# Altium PCB CC2541Dev_board.PcbDoc
Units mm, origin at the board's own origin, x right, y up, seen from the top; angles counter-clockwise.
Board outline 62.9 x 61.5 mm, 2 copper layers (Top Layer, Bottom Layer), stack 1.671 mm thick; 18 components, 33 nets, 99 pads, 46 vias.
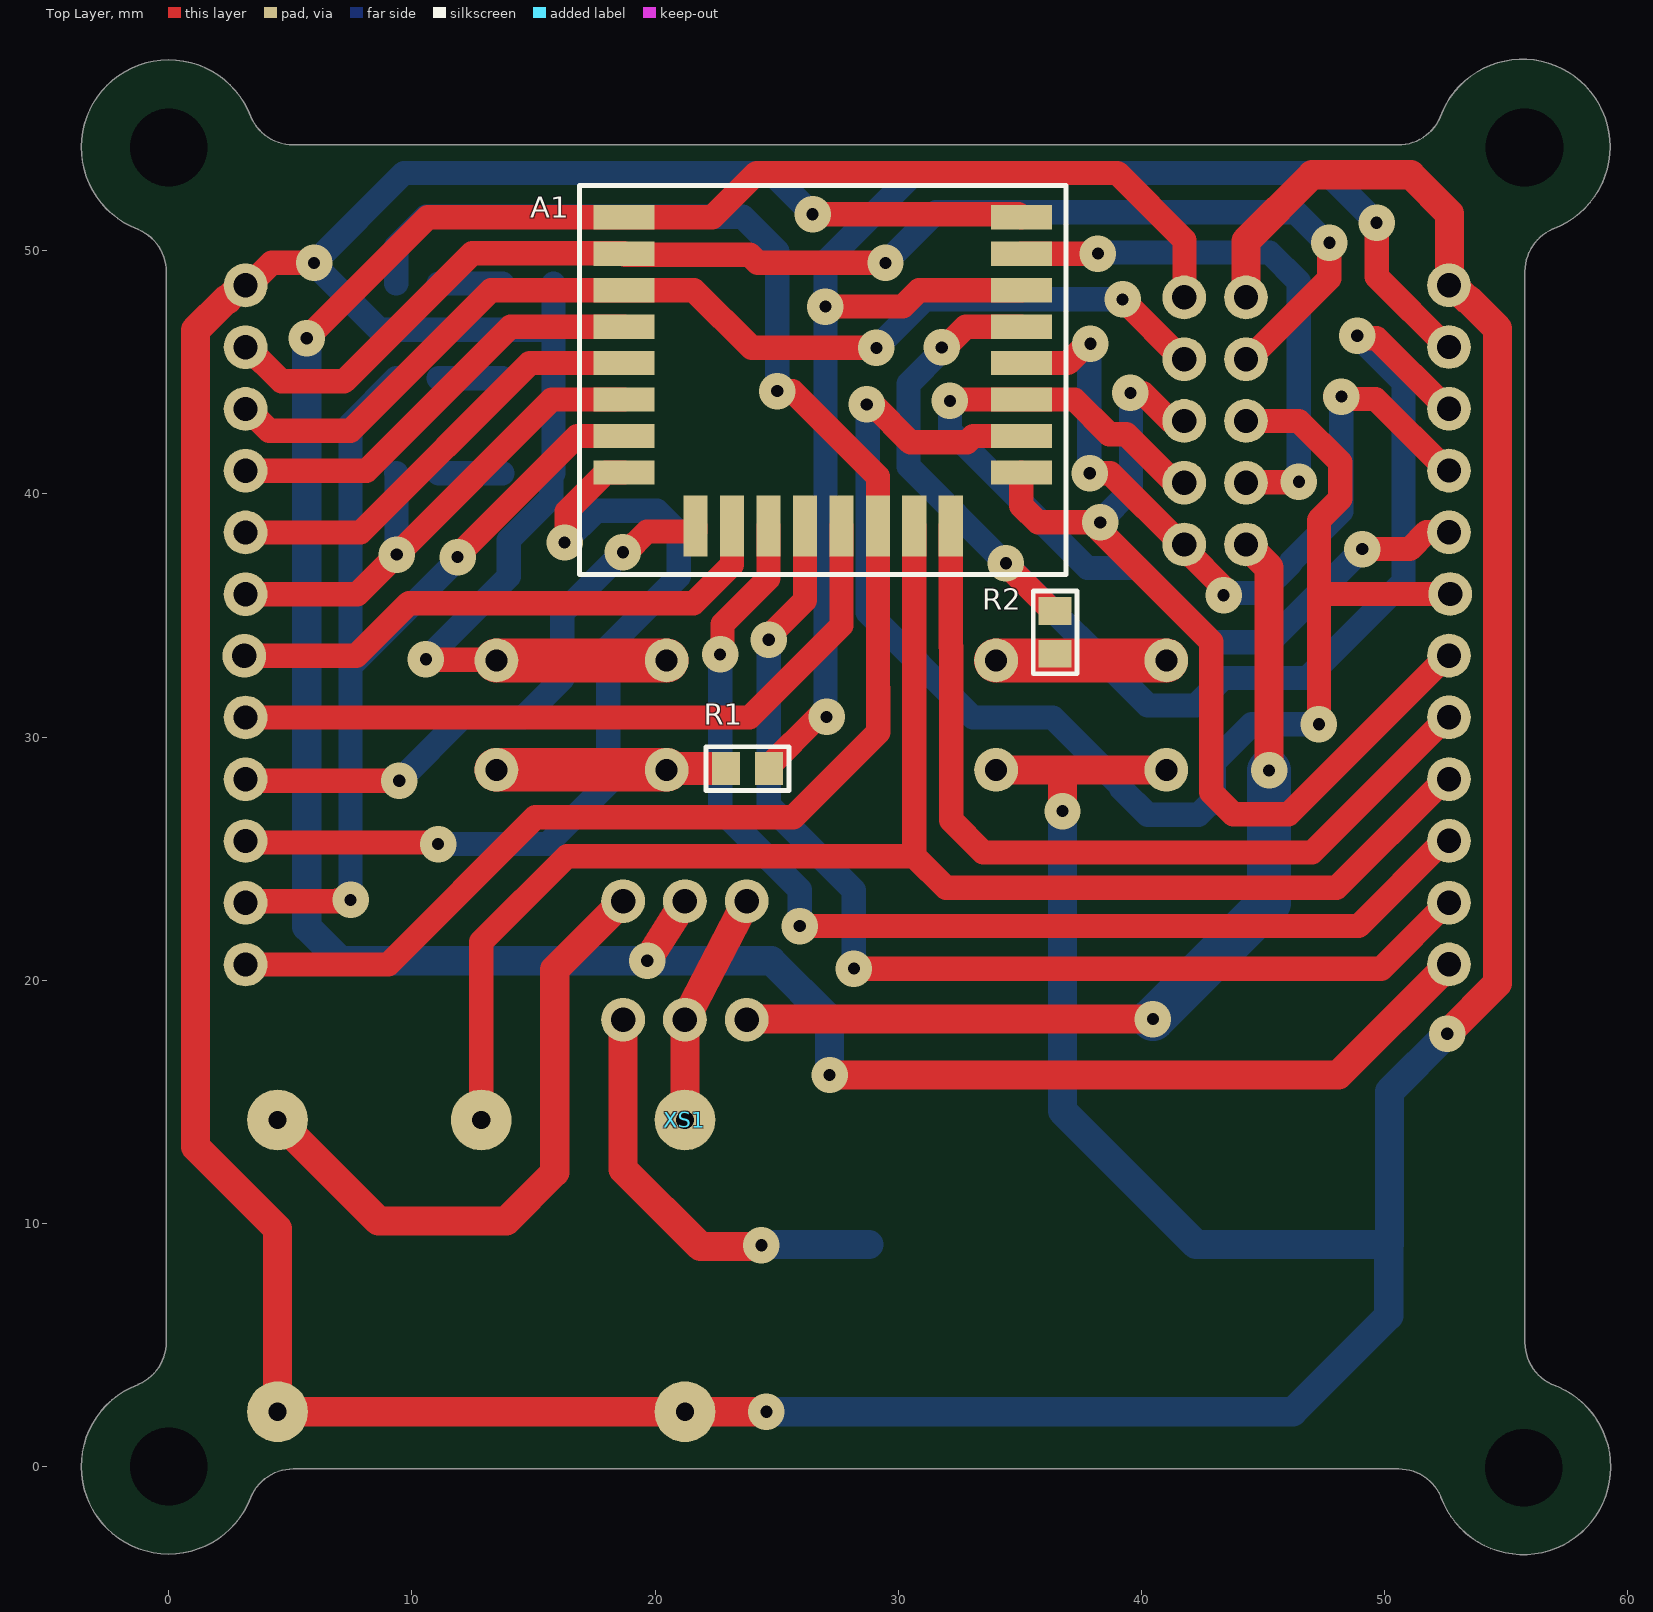
[diagram p0: Top Layer view]
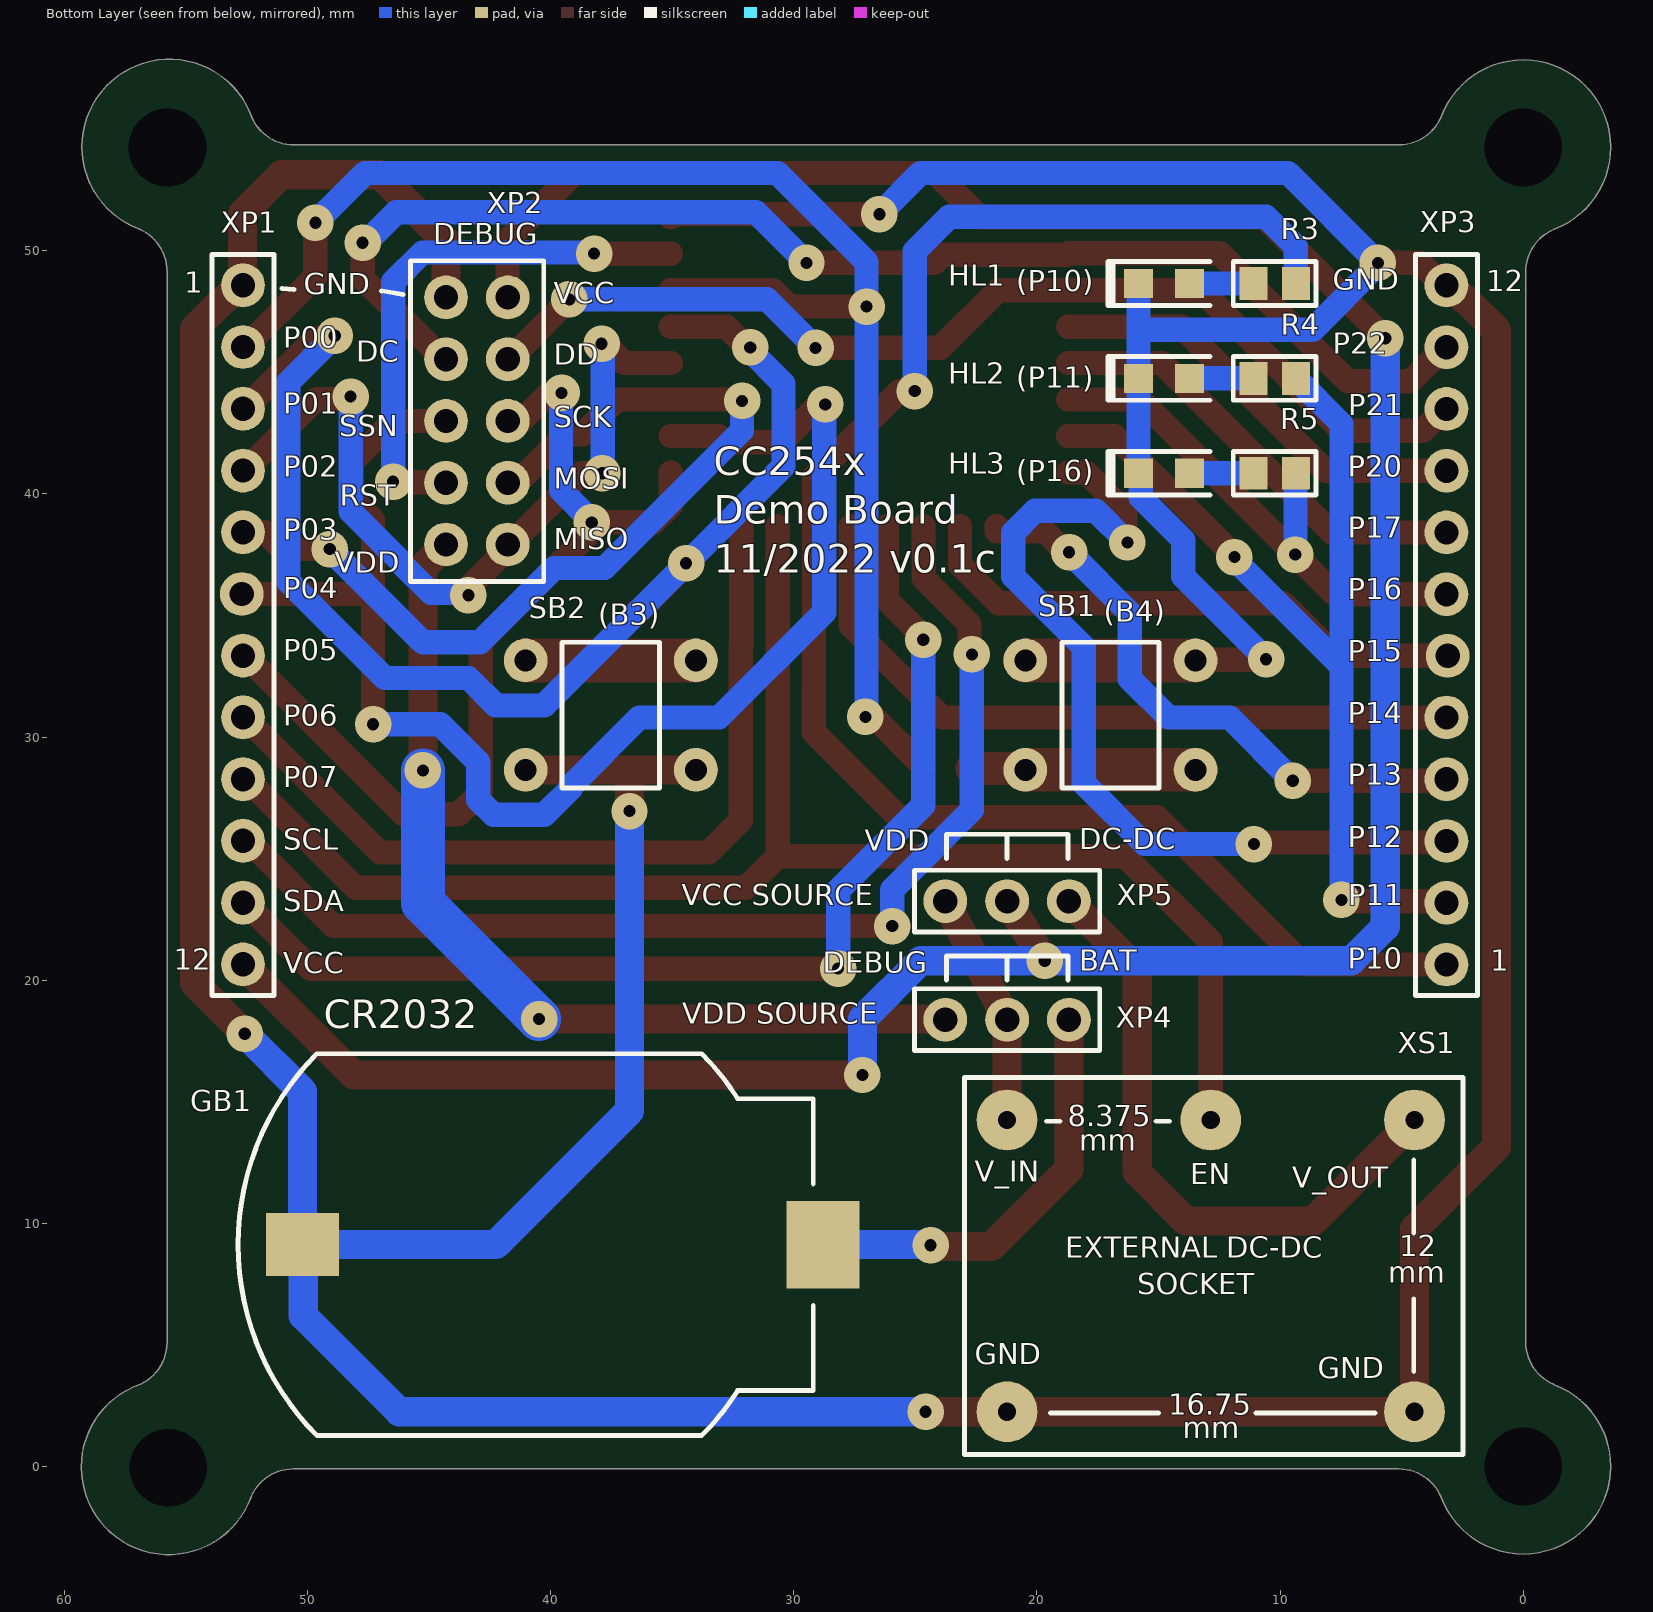
[diagram p1: Bottom Layer view, seen from below]
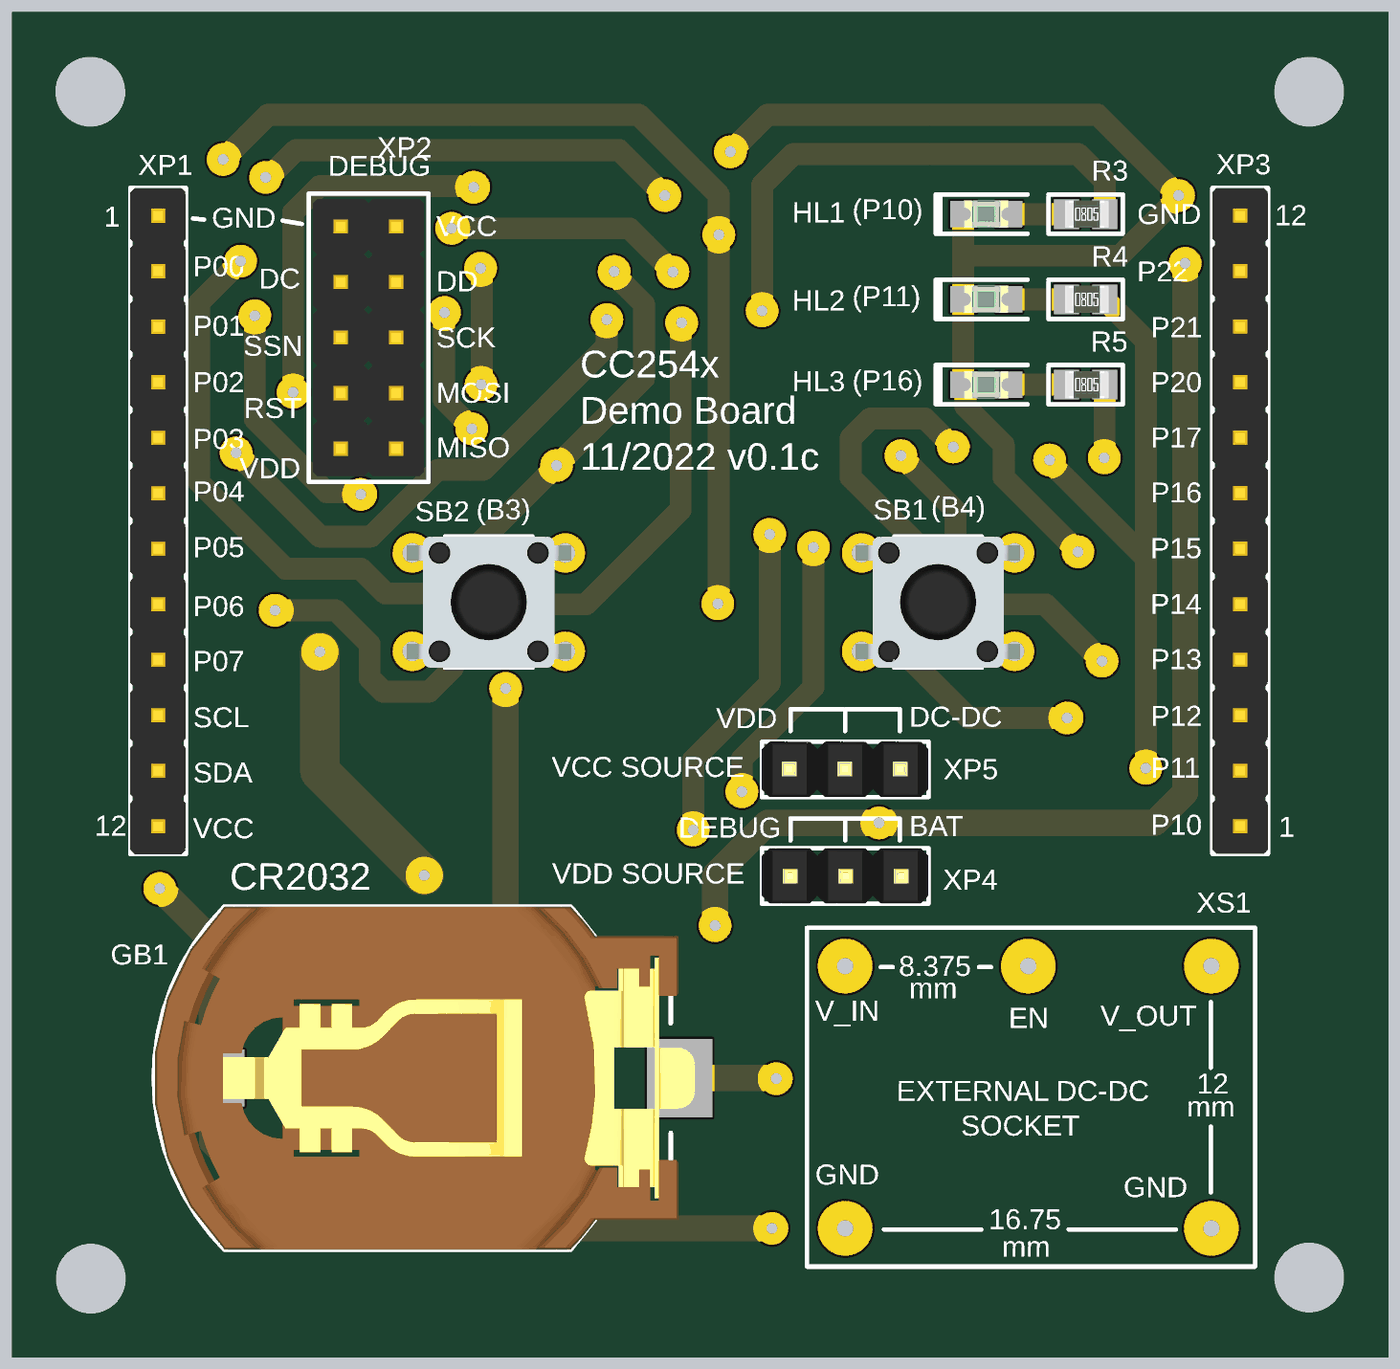
[diagram p2: 3D render of the assembled board from below, using the file's embedded part models]

## Layer stack, top to bottom
Top Solder: solder mask 0.0102, Solder Resist, Dk 3.5
Top Layer: signal copper 0.0356
Dielectric 1: dielectric 1.6, FR-4, Dk 4.8
Bottom Layer: signal copper 0.0356
Bottom Solder: solder mask 0.0102, Solder Resist, Dk 3.5

## Board outline
-1.272,3.368 ccw(c0,0) 3.368,-1.272 ccw(c3.285,-1.215) 3.378,-1.255 cw(c5.125,-2) 5.124,-0.1 ccw(c5.125,0) 5.125,-0.1 50.575,-0.1 cw(c50.575,-2) 52.309,-1.225 ccw(c52.409,-1.217) 52.315,-1.251 ccw(c55.7,-0.025) 59.3,-0.025 ccw(c55.7,-0.025) 56.865,3.382 cw(c57.675,5.1) 55.775,5.1 ccw(c55.675,5.1) 55.775,5.101 55.775,49.149 ccw(c55.675,49.15) 55.775,49.15 cw(c57.675,49.15) 56.93,50.897 ccw(c56.89,50.99) 56.947,50.907 ccw(c55.675,54.275) 59.275,54.275 ccw(c55.675,54.275) 52.29,55.501 ccw(c52.384,55.467) 52.284,55.475 cw(c50.55,56.25) 50.55,54.35 5.125,54.35 ccw(c5.125,54.25) 5.124,54.35 cw(c5.125,56.25) 3.378,55.505 ccw(c3.285,55.465) 3.368,55.522 ccw(c0,54.25) -1.272,50.882 ccw(c-1.215,50.965) -1.255,50.872 cw(c-2,49.125) -0.1,49.127 cw(c-2,49.125) -0.1,49.125 cw(c0,49.125) -0.1,49.127 -0.1,49.125 -0.1,5.125 cw(c-2,5.125) -1.255,3.378 ccw(c-1.215,3.285)

## Design rules (kind name [scope] priority, off if disabled: settings)
Clearance [All] p1: gap=0.45 ignorepadtopadclearanceinfootprint=FALSE
HoleSize [All] p1: absolutevalues=TRUE maxlimit=5 minlimit=0.025 maxpercent=80.000 minpercent=20.000
PolygonConnect [All] p1: connectstyle=Relief reliefconductorwidth=0.254 reliefentries=4 polygonreliefangle="90 Angle" airgapwidth=0.254
RoutingVias [All] p1: holewidth=0.711 width=1.27 viastyle="Through Hole" minholewidth=0.711 minwidth=1.27 maxholewidth=0.711 maxwidth=1.27
SilkToSilkClearance [All] p1: silktosilkclearance=0.15
SilkToSolderMaskClearance [IsPad] p1: minsilkscreentomaskgap=0.1 clearancetoexposedcopper=TRUE
SolderMaskExpansion [All] p1: expansion=0.102
Width [All] p1: maxlimit=5 minlimit=0.4 preferedwidth=0.5
27 further rules are at their usual default settings.

## Classes and differential pairs
component class CC2541Dev_board: GB1 HL1 HL2 HL3 R1 R2 R3 R4 R5 SB1 SB2 XP1 XP2 XP3 XP4 XP5 XS1

## Components (designator, comment, footprint, x,y, rotation, side; value= is the part's Value field where it differs from the comment)
A1 "JDY-08" JDY-08 26.894,49.179 r0 top
GB1 "CR2032" S8421R 41.7,9.125 r90 bottom
HL1 "Green" LED_0805_GREEN 14.775,48.65 r0 bottom
HL2 "Red" LED_0805_GREEN 14.775,44.75 r0 bottom
HL3 "Blue" LED_0805_GREEN 14.775,40.85 r0 bottom
R1 "270R" RES_0805 23.8,28.7 r0 top
R2 "270R" RES_0805 36.45,34.3 r90 top
R3 "270R" RES_0805 10.225,48.65 r180 bottom
R4 "270R" RES_0805 10.225,44.75 r180 bottom
R5 "270R" RES_0805 10.225,40.85 r180 bottom
SB1 "Tact switch" KLS7-TS6601-5.0-180 16.975,30.9 r90 bottom
SB2 "Tact switch" KLS7-TS6601-5.0-180 37.525,30.9 r270 bottom
XP1 "Additional pins 1" PLS12 52.698,34.614 r270 bottom
XP2 "SoC Debug/Flash" PLD10 43.03,43 r270 bottom
XP3 "Additional pins 2" PLS12 3.107,34.609 r90 bottom
XP4 "VDD source" PLS3 21.225,18.375 r0 bottom
XP5 "VCC source" PLS3 21.225,23.25 r180 bottom
XS1 "DC-DC module socket" PAD 21.225,14.25 r180 top

## Footprints (in the part's own frame and the unit in brackets; to place one, negate y for a bottom-side part, rotate by r counter-clockwise, add the part's x,y. Pads: shape width x height; smd on the part's side, far side on the other; paste and mask are expansions set on the pad)
JDY-08 [mm]
  rect 2.5x1 smd: 1(-8.17,2.2) 2(-8.17,0.7) 3(-8.17,-0.8) 4(-8.17,-2.3) 5(-8.17,-3.8) 6(-8.17,-5.3) 7(-8.17,-6.8) 8(-8.17,-8.3) 17(8.17,-8.3) 18(8.17,-6.8) 19(8.17,-5.3) 20(8.17,-3.8) 21(8.17,-2.3) 22(8.17,-0.8) 23(8.17,0.7) 24(8.17,2.2)
  rect 1x2.5 smd: 9(-5.23,-10.5) 10(-3.73,-10.5) 11(-2.23,-10.5) 12(-0.73,-10.5) 13(0.77,-10.5) 14(2.27,-10.5) 15(3.77,-10.5) 16(5.27,-10.5)
  silkscreen extent -10,-12.5 10,3.5, body extent -7.47,-9.8 7.47,9.8, height 2
KLS7-TS6601-5.0-180 [mm]
  round 1.8 hole 0.9: 1(2.25,-3.5) 1(2.25,3.5) 2(-2.25,-3.5) 2(-2.25,3.5)
  silkscreen extent -3,-2 3,2, body extent -3,-3.75 3,3.75, height 11.5
LED_0805_GREEN [mm]
  rect 1.2x1.2 smd: 1(-1.05,0) 2(1.05,0)
  silkscreen extent -1.9,-0.9 2.31,0.9, body extent -1,-0.63 1,0.63, height 0.9
PAD [mm]
  round 2.5 hole 0.75: 1(0,0)
PLD10 [mm]
  round 1.8 hole 1: 1(-5.08,-1.27) 2(-5.08,1.27) 3(-2.54,-1.27) 4(-2.54,1.27) 5(0,-1.27) 6(0,1.27) 7(2.54,-1.27) 8(2.54,1.27) 9(5.08,-1.27) 10(5.08,1.27)
  silkscreen extent -6.59,-2.73 6.6,2.75, body extent -6.35,-2.54 6.35,2.54, height 8.54
PLS3 [mm]
  round 1.8 hole 1: 1(-2.54,0) 2(0,0) 3(2.54,0)
  silkscreen extent -3.81,-1.27 3.81,1.27, body extent -3.81,-1.27 3.81,1.27, height 9.2
PLS12 [mm]
  round 1.8 hole 1: 1(-13.965,0.05) 2(-11.425,0.05) 3(-8.885,0.05) 4(-6.345,0.05) 5(-3.805,0.05) 6(-1.27,0) 7(1.265,0.05) 8(3.805,0.05) 9(6.345,0.05) 10(8.885,0.05) 11(11.425,0.05) 12(13.965,0.05)
  silkscreen extent -15.24,-1.22 15.24,1.32, body extent -15.24,-1.22 15.24,1.32, height 8.54
RES_0805 [mm]
  rect 1.15x1.35 smd: 1(-0.875,0) 2(0.875,0)
  silkscreen extent -1.7,-0.9 1.7,0.9, body extent -0.95,-0.62 1.05,0.63, height 0.6
S8421R [mm]
  rect 3.6x3 smd: 1(0,-12.9)
  rect 2.6x3 smd: 2(0,8.5)
  silkscreen extent -7.85,-12.5 7.85,11.15, body extent -7.85,-13.6 7.85,11.15, height 5.3

## Part data
A1: "Модуль BLE, на базе МК CC2541", Class=Устройство
GB1: library part BAT, "Батарея", Class="Генераторы, источники питания"
HL1 HL2 HL3: "Светодиод, прибор световой сигнализации", Class="Устройства индикационные и сигнальные", Note=Color
R1 R2 R3 R4 R5: library part RESISTOR, "Постоянный резистор  / (\"Mode\" переключает внешний вид) / \ 0.25 Вт; \\ 0.125 Вт; \\\ 0.05 Вт; -- 0.5 Вт;", Class=Резисторы
SB1 SB2: "Выключатель кнопочный (кнопка) / (\"Mode\" переключает внешний вид) / 1. Замыкающая без фиксации / 2. Замыкающая c фиксацией / 3. Размыкающая без фиксации  / 4. Размыкающая с фиксации", Class="Устройства коммутационные в цепях управления, сигнализации и измерительных"
XP1 XP3: "Штырь, 12 контактов", Class="Соединения контактные"
  XP1: Contact_1=GND, Contact_2=P0_0, Contact_3=P0_1, Contact_4=P0_2, Contact_5=P0_3, Contact_6=P0_4, Contact_7=P0_5, Contact_8=P0_6, Contact_9=P0_7, Contact_10=SCL, Contact_11=SDA, Contact_12=VCC
  XP3: Contact_1=P1_0, Contact_2=P1_1, Contact_3=P1_2, Contact_4=P1_3, Contact_5=P1_4, Contact_6=P1_5, Contact_7=P1_6, Contact_8=P1_7, Contact_9=P2_0, Contact_10=P2_1, Contact_11=P2_2, Contact_12=GND
XP2: "Штырь, 10 контактов", Class="Соединения контактные", Contact_1=GND, Contact_2=VCC, Contact_3=DC, Contact_4=DD, Contact_5=SSN, Contact_6=SCK, Contact_7=RESET_N, Contact_8=MOSI, Contact_9=VDD, Contact_10=MISO
XP4 XP5: "Штырь, 3 контакта / (\"Mode\" переключает внешний вид)", Class="Соединения контактные"
XS1: "Гнездо, 5 контактов", Class="Соединения контактные", Contact_1=VDD_IN, Contact_2=VDD_OUT, Contact_3=ENABLE, Contact_4=GND, Contact_5=GND

## Free pads (board coordinates)
  round 2.5 hole 0.75: 2(4.475,14.25) 3(12.85,14.25) 4(4.475,2.25) 5(21.225,2.25)
  round 0 / inner round 1.5 / far side round 0 hole 3.2 unplated: ""(0,0) ""(55.725,-0.05) ""(55.75,54.25)
  round 0 / inner round 1.5 / far side round 0 hole 3.2 unplated paste+0: ""(0,54.25)

## Via types
v1: diameter 1.5, hole 0.5, Top Layer to Bottom Layer, 46 vias

## Nets (pads, with @x,y where several pads share a name; then routed paths per layer and width w, separated by ;. In a path a pad name is that pad's centre, name@x,y a point inside that pad or via, vN(x,y) a via of type N, cw(c..) or ccw(c..) an arc to the next point about the centre after c; other vN are vias at no path point)
EXT_VDD: XP2.9 XP4.3 | length 38.6
  Top Layer w1.2: XP4.3 23.79,18.4 v1(40.475,18.4) ; XP2.9 45.25,36.97 v1(45.25,28.625)
  Bottom Layer w1.8: v1(40.475,18.4) 45.25,23.175 v1(45.25,28.625)
GND: A1.24 GB1.2 HL1.2 HL2.2 HL3.2 pad.4 pad.5 SB1.1 SB2.1 XP1.1 XP2.1 XP3.12 | length 266.7
  Top Layer w1: XP3.12 3.231,48.5 4.231,49.5 v1(5.975,49.5) ; v1(10.575,33.2) 10.6,33.175 13.45,33.175 SB1.1@13.475,33.15 ; v1(26.475,51.5) 34.943,51.5 A1.24
  Top Layer w1.2: XP3.12 2.995,48.574 2.405,47.984 2.349,47.984 1.1,46.735 1.1,13.15 4.475,9.775 pad.4 pad.5 v1(24.575,2.25) ; SB2.1@34.025,28.65 36.755,28.65 ; v1(36.755,26.954) 36.755,28.65 ; SB2.1@41.025,28.65 36.755,28.65 ; XP2.1 44.3,50.4 47.025,53.125 51.075,53.125 52.675,51.525 XP1.1@52.675,48.579 ; v1(52.575,17.8) 54.648,19.873 54.648,46.797 53.456,47.989 53.4,47.989 52.81,48.579 XP1.1@52.675,48.579 ; XP1.1 XP1.1@52.675,48.579
  Top Layer w1.8: SB1.1@13.475,33.15 SB1.1@20.475,33.15
  Bottom Layer w1: v1(10.575,33.2) 13.975,36.6 13.975,38.104 15.725,39.854 15.725,40.75 HL3.2 HL1.2 ; 15.725,46.75 8.656,46.75 5.975,49.431 v1(5.975,49.5) 9.675,53.2 24.775,53.2 v1(26.475,51.5) ; SB1.1@20.475,33.15 SB1.1@20.475,33.366
  Bottom Layer w1.2: v1(24.575,2.25) 46.225,2.25 50.175,6.2 50.175,9.1 GB1.2 ; v1(36.755,26.954) 36.755,14.62 42.25,9.125 GB1.2 ; v1(52.575,17.8) 50.2,15.425 GB1.2
INT_VDD: GB1.1 XP4.1 | length 17.6
  Top Layer w1.2: XP4.1 18.685,12.225 21.867,9.043 24.318,9.043 v1(24.375,9.1)
  Bottom Layer w1.2: v1(24.375,9.1) 24.4,9.125 GB1.1
NetHL1_1: HL1.1 R3.1 | length 2.6
  Bottom Layer w1: R3.1 HL1.1
NetHL2_1: HL2.1 R4.1 | length 2.6
  Bottom Layer w1: R4.1 HL2.1
NetHL3_1: HL3.1 R5.1 | length 2.6
  Bottom Layer w1: R5.1 HL3.1
NetR1_1: R1.1 SB1.2 | length 9.2
  Top Layer w1.35: SB1.2@20.475,28.65 20.525,28.7 R1.1@22.675,28.7
  Top Layer w1.8: SB1.2@13.475,28.65 SB1.2@20.475,28.65
NetR2_1: R2.1 SB2.2 | length 7
  Top Layer w1.8: SB2.2@34.025,33.15 35.975,33.15 SB2.2@41.025,33.15
NetXP5_3: pad.2 XP5.3 | length 26.3
  Top Layer w1.2: pad.2 8.625,10.1 13.875,10.1 15.875,12.1 15.875,20.44 XP5.3
P0_0: A1.22 R1.2 XP1.2 | length 61.8
  Top Layer w1: R1.2 24.675,28.8 26.7,30.825 v1(27.05,30.825) ; v1(27.004,47.705) 30.18,47.705 30.854,48.379 A1.22 ; v1(49.675,51.15) 49.675,48.936 XP1.2@52.61,46.001
  Bottom Layer w1: v1(27.05,30.825) 27.004,30.871 v1(27.004,47.705) 27.004,49.529 30.675,53.2 47.625,53.2 v1(49.675,51.15)
P0_1: A1.21 R2.2 XP1.3 | length 54.4
  Top Layer w1: v1(31.791,46.025) 31.926,46.025 32.78,46.879 A1.21 ; v1(34.425,37.15) 34.425,37.1 36.35,35.175 R2.2 ; v1(48.875,46.5) 48.971,46.404 49.666,46.404 52.572,43.499 XP1.3
  Bottom Layer w1: v1(31.791,46.025) 31.791,45.895 30.425,44.529 30.425,41.125 v1@34.412,37.138 ; v1@34.362,37.088 34.471,37.088 40.259,31.3 42.25,31.3 43.375,32.425 46.821,32.425 50.78,36.384 50.78,44.595 v1(48.875,46.5)
P0_2: A1.20 XP1.4 XP2.10 | length 33.3
  Top Layer w1: A1.20 36.969,45.379 37.765,46.175 v1(37.9,46.175) ; v1(37.875,40.85) 38.72,40.85 41.688,37.882 41.722,37.882 41.845,37.759 41.845,37.679 43.379,36.145 v1@43.379,35.861 ; v1@47.975,44 v1(48.225,44) 48.321,43.904 49.626,43.904 52.572,40.959 XP1.4
  Bottom Layer w1: v1(37.875,40.85) 37.85,40.875 37.85,46.125 v1(37.9,46.175) ; v1(43.38,35.829) 43.476,35.925 44.921,35.925 46.15,37.154 46.15,37.203 48.225,39.278 v1(48.225,44)
P0_3: A1.19 XP1.5 XP2.8 | length 37.5
  Top Layer w1: v1(32.125,43.825) 32.179,43.879 A1.19 37.25,43.879 38.679,42.45 39.375,42.45 41.365,40.46 XP2.8 ; v1(49.08,37.729) 51.031,37.729 51.721,38.419 XP1.5@51.848,38.419
  Bottom Layer w1: v1(32.125,43.825) 32.125,42.605 37.78,36.95 39.855,36.95 42.905,33.9 45.251,33.9 v1(49.08,37.729)
P0_4: A1.18 XP1.6 XP2.5 | length 60.1
  Top Layer w1: v1(28.704,43.68) 28.945,43.68 30.5,42.125 32.829,42.125 33.083,42.379 A1.18 ; XP2.5 46.475,43 48.175,41.3 48.175,39.796 47.3,38.921 v1(47.3,30.525) ; 47.675,35.884 XP1.6@51.898,35.884
  Bottom Layer w1: v1(28.704,43.68) 28.75,43.634 28.75,35.125 33.075,30.8 36.354,30.8 39.175,27.979 39.175,27.884 40.259,26.8 42.35,26.8 42.975,27.425 42.975,28.966 44.534,30.525 v1(47.3,30.525)
P0_5: A1.17 XP1.7 XP2.6 | length 39.2
  Top Layer w1: A1.17 35.064,39.511 35.746,38.829 v1(38.305,38.829) 38.305,38.487 42.875,33.916 42.875,32.384 42.875,27.725 43.775,26.825 46.048,26.825 52.573,33.351 XP1.7@52.573,33.369 ; v1(39.55,44.15) 40.05,44.15 41.2,43 XP2.6
  Bottom Layer w1: v1(38.305,38.829) 38.305,38.875 39.575,40.146 39.575,44.125 v1(39.55,44.15)
P0_6: A1.16 XP1.8 | length 35.4
  Top Layer w1: A1.16 32.164,33.716 32.175,33.705 32.175,26.575 33.496,25.254 47.016,25.254 XP1.8@52.61,30.847
P0_7: A1.15 pad.3 XP1.9 | length 64.3
  Top Layer w1: pad.3 12.85,21.575 16.375,25.1 30.664,25.1 31.964,23.8 48.025,23.8 52.325,28.1 XP1.9@52.325,28.35 ; 30.664,25.2 A1.15
P1_0: A1.14 R3.2 XP3.1 | length 70.1
  Top Layer w1: XP3.1 9.019,20.644 15.075,26.7 25.675,26.7 29.175,30.2 29.175,32.004 29.164,32.015 A1.14 29.164,40.711 25.65,44.225 v1(25.025,44.225)
  Bottom Layer w1: R3.2 9.35,50.175 10.575,51.4 23.6,51.4 25.025,49.975 v1(25.025,44.225)
P1_1: A1.7 R4.2 XP3.2 | length 41.9
  Top Layer w1: XP3.2 3.215,23.242 6.917,23.242 6.975,23.3 v1(7.475,23.3) ; v1(11.875,37.4) 11.875,37.451 16.803,42.379 A1.7
  Bottom Layer w1: v1(7.475,23.3) v1@7.475,23.8 ; v1@7.475,23.8 7.475,32.9 ; R4.2 7.475,42.875 7.475,32.9 ; v1(11.875,37.4) 11.875,37.3 7.475,32.9
P1_2: A1.8 XP3.3 | length 37.5
  Top Layer w1: XP3.3 3.219,25.662 11.013,25.662 v1(11.075,25.6) ; v1(16.275,38) 16.371,38.096 16.371,39.276 17.974,40.879 A1.8
  Bottom Layer w1: v1(11.075,25.6) 15.575,25.6 18.075,28.1 18.075,33.7 20.975,36.6 20.975,38.4 20.075,39.3 17.575,39.3 v1(16.275,38)
P1_3: A1.9 XP3.4 | length 24.6
  Top Layer w1: XP3.4 3.193,28.3 3.293,28.2 v1(9.475,28.2) ; v1(18.675,37.6) 18.81,37.6 19.664,38.454 21.664,38.454 A1.9
  Bottom Layer w1: v1(9.475,28.2) 12.075,30.8 14.575,30.8 16.175,32.4 16.175,35.1 v1(18.675,37.6)
P1_4: A1.13 XP3.5 | length 30.2
  Top Layer w1: XP3.5 23.883,30.804 27.664,34.585 A1.13
P1_5: A1.10 XP3.6 | length 23.2
  Top Layer w1: XP3.6 7.714,33.339 9.875,35.5 21.578,35.5 23.164,37.085 A1.10
P1_6: A1.6 R5.2 XP3.7 | length 22.2
  Top Layer w1: XP3.7 7.749,35.874 v1(9.375,37.5) 15.754,43.879 A1.6
  Bottom Layer w1: R5.2 9.362,40.838 9.362,37.513 v1(9.375,37.5)
P1_7: A1.5 XP3.8 | length 18.5
  Top Layer w1: XP3.8 7.885,38.414 14.85,45.379 A1.5
P2_0: A1.4 XP3.9 | length 18
  Top Layer w1: XP3.9 8.129,40.954 14.054,46.879 A1.4
P2_1: A1.3 XP2.4 XP3.10 | length 44.2
  Top Layer w1: XP3.10 3.233,43.494 4.127,42.6 7.475,42.6 13.254,48.379 A1.3 21.596,48.379 23.97,46.005 v1(29.104,46.005) ; v1(39.225,48) 39.225,47.999 41.684,45.54 XP2.4
  Bottom Layer w1: v1(29.104,46.005) 31.099,48 v1(39.225,48)
P2_2: A1.2 XP2.3 XP3.11 | length 55.1
  Top Layer w1: XP3.11 3.233,46.034 4.633,44.634 7.209,44.634 12.475,49.9 18.703,49.9 A1.2 18.774,49.829 23.896,49.829 24.225,49.5 v1(29.475,49.5) ; XP2.3@44.358,45.483 47.73,48.855 v1(47.73,50.33)
  Bottom Layer w1: v1(29.475,49.5) 31.554,51.579 46.346,51.579 47.595,50.33 v1(47.73,50.33)
RESET: A1.23 XP2.7 | length 22.4
  Top Layer w1: A1.23 v1(38.211,49.879) ; XP2.7 44.32,40.48 46.415,40.48 46.435,40.46 v1(46.475,40.5)
  Bottom Layer w1: v1(38.211,49.879) 38.262,49.93 45.266,49.93 46.475,48.721 v1(46.475,40.5)
SCL: A1.11 XP1.10 | length 46.8
  Top Layer w1: v1(22.675,33.4) 22.771,33.496 22.771,34.641 24.664,36.535 A1.11 ; v1(25.95,22.225) 27.25,22.225 48.925,22.225 52.429,25.729 XP1.10
  Bottom Layer w1: v1(22.675,33.4) 22.675,27 25.95,23.725 v1(25.95,22.225)
SDA: A1.12 XP1.11 | length 45.8
  Top Layer w1: v1(24.675,34) 24.675,34.135 26.164,35.624 A1.12 ; v1(28.175,20.475) 49.858,20.475 XP1.11@52.61,23.227
  Bottom Layer w1: v1(24.675,34) 24.675,27.2 28.175,23.7 v1(28.175,20.475)
VCC: A1.1 XP1.12 XP2.2 XP5.2 | length 122.1
  Top Layer w1: v1(5.675,46.4) 10.654,51.379 A1.1 22.354,51.379 24.175,53.2 39,53.2 41.775,50.425 XP2.2@41.775,48.08
  Top Layer w1.2: v1(19.675,20.8) XP5.2 ; v1(27.175,16.1) 48.099,16.1 XP1.12
  Bottom Layer w1.2: v1@5.675,46.3 5.675,22.196 7.071,20.8 v1(19.675,20.8) 24.775,20.8 27.175,18.4 v1(27.175,16.1)
VDD: XP4.2 XP5.1 XS1.1 | length 9.6
  Top Layer w1.2: XS1.1 XP4.2 XP5.1

## Other copper
Top Layer:
  region: 34.025,28.65

## Silkscreen, mask and mechanical layers (free items; w line width, h text height)
Bottom Overlay:
  lines w0.2: 4.5,3.9 4.5,6.9 ; 4.5,9.6 4.5,12.6 ; 6.1,2.2 11,2.2 ; 14.55,14.2 15.1,14.2 ; 15,2.2 19.45,2.2 ; 18.725,20 18.725,21 21.225,21 ; 18.725,25 18.725,26 21.225,26 ; 19.05,14.2 19.6,14.2 ; 21.225,20 21.225,21 ; 21.225,25 21.225,26 ; 23.725,20 23.725,21 21.225,21 ; 23.725,25 23.725,26 21.225,26 ; 46.075,48.2 46.95,48.35 ; 50.55,48.4 51.05,48.45 ; 2.475,0.5 22.975,0.5 22.975,16 2.475,16 2.475,0.5
  text "DEBUG" at 44.825,49.975 h1.5
  text "GND" at 7.825,48.1 h1.5
  text "12" at 1.525,48.05 h1.5
  text "(P10)" at 20.85,48.05 h1.5
  text "1" at 55.075,47.975 h1.5
  text "GND" at 50.15,47.925 h1.5
  text "VCC" at 39.875,47.55 h1.5
  text "P00" at 51,45.725 h1.5
  text "P22" at 7.825,45.475 h1.5
  text "DC" at 48,45.15 h1.5
  text "DD" at 39.875,45.025 h1.5
  text "(P11)" at 20.85,44.075 h1.5
  text "P01" at 51,43 h1.5
  text "P21" at 7.2,42.95 h1.5
  text "SCK" at 39.875,42.45 h1.5
  text "SSN" at 48.7,42.075 h1.5
  text "P20" at 7.206,40.425 h1.5
  text "P02" at 51,40.425 h1.5
  text "(P16)" at 20.85,40.225 h1.5
  text "MOSI" at 39.875,39.925 h1.5
  text "RST" at 48.675,39.225 h1.5
  text "P17" at 7.21,37.9 h1.5
  text "P03" at 51,37.825 h1.5
  text "MISO" at 39.875,37.425 h1.5
  text "VDD" at 48.875,36.475 h1.5
  text "CC254x  / Demo Board / 11/2022 v0.1c" at 33.3,36.375 h2
  text "P04" at 51,35.425 h1.5
  text "P16" at 7.21,35.375 h1.5
  text "(B4)" at 17.25,34.45 h1.5
  text "(B3)" at 38.05,34.325 h1.5
  text "P05" at 51,32.875 h1.5
  text "P15" at 7.217,32.825 h1.5
  text "P14" at 7.217,30.275 h1.5
  text "P06" at 51,30.175 h1.5
  text "P13" at 7.21,27.75 h1.5
  text "P07" at 51,27.65 h1.5
  text "P12" at 7.206,25.175 h1.5
  text "DC-DC" at 18.25,25.1 h1.5
  text "SCL" at 51,25.075 h1.5
  text "VDD" at 27.075,25.025 h1.5
  text "P11" at 7.2,22.8 h1.5
  text "VCC SOURCE" at 34.6,22.8 h1.5
  text "SDA" at 51,22.55 h1.5
  text "P10" at 7.206,20.175 h1.5
  text "12" at 55.5,20.15 h1.5
  text "1" at 1.35,20.1 h1.5
  text "BAT" at 18.25,20.1 h1.5
  text "DEBUG" at 28.8,20.025 h1.5
  text "VCC" at 51,20 h1.5
  text "VDD SOURCE" at 34.575,17.925 h1.5
  text "CR2032" at 49.325,17.625 h2
  text "8.375" at 18.725,13.7 h1.5
  text "mm" at 18.25,12.7 h1.5
  text "V_IN" at 22.55,11.425 h1.5
  text "EN" at 13.7,11.325 h1.5
  text "V_OUT" at 9.5,11.175 h1.5
  text "12" at 5.1,8.35 h1.5
  text "mm" at 5.55,7.275 h1.5
  text "EXTERNAL DC-DC /         SOCKET" at 18.825,6.8 h1.5
  text "GND" at 22.55,3.925 h1.5
  text "GND" at 8.45,3.35 h1.5
  text "16.75" at 14.6,1.85 h1.5
  text "mm" at 14,0.875 h1.5
Mechanical 1:
  lines w0.2: -1.215,3.285 ccw(c-2,5.125) 0,5.125 0,49.125 ccw(c-2,49.125) -1.215,50.965 ; -1.214,3.283 ccw(c0,0) 3.283,-1.214 ; -1.214,50.967 cw(c0,54.25) 3.283,55.464 ; 3.285,-1.215 cw(c5.125,-2) 5.125,0 50.575,0 cw(c50.575,-2) 52.415,-1.215 ; 3.285,55.465 ccw(c5.125,56.25) 5.125,54.25 50.55,54.25 ccw(c50.55,56.25) 52.39,55.465 ; 52.384,55.467 cw(c55.675,54.275) 56.889,50.992 ; 52.409,-1.217 ccw(c55.7,-0.025) 56.828,3.288 ; 56.89,3.26 cw(c57.675,5.1) 55.675,5.1 55.675,49.15 cw(c57.675,49.15) 56.89,50.99
Mechanical 11:
  lines w0.2: 0,3.475 0,0 3.475,0